# Altium PCB singlePCB.PcbDoc
Units mm, origin at the board's own origin, x right, y up, seen from the top; angles counter-clockwise.
Board outline 20 x 23.65 mm, 2 copper layers (Top Layer, Bottom Layer); 2 components, 1 nets, 2 pads, 2 vias.
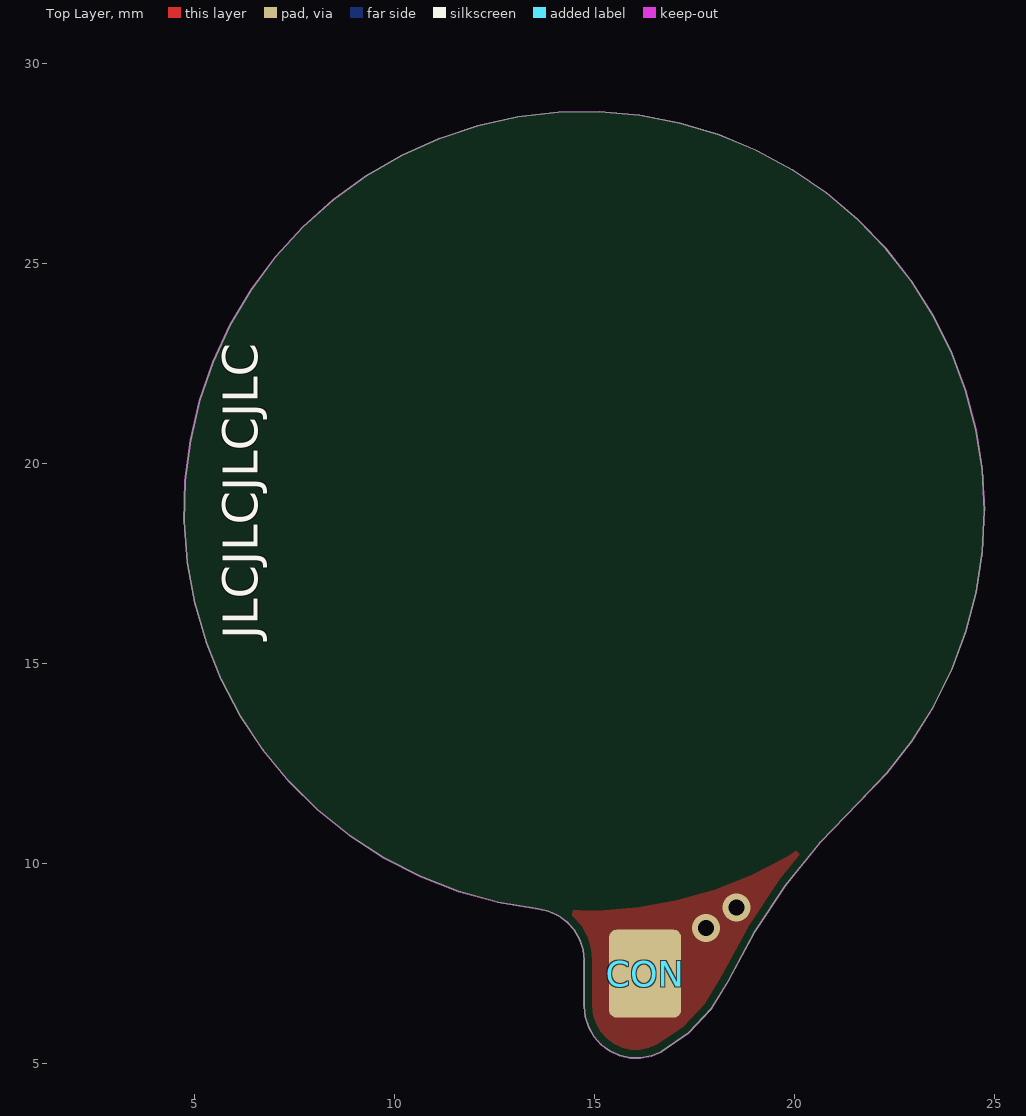
[diagram p0: Top Layer view]
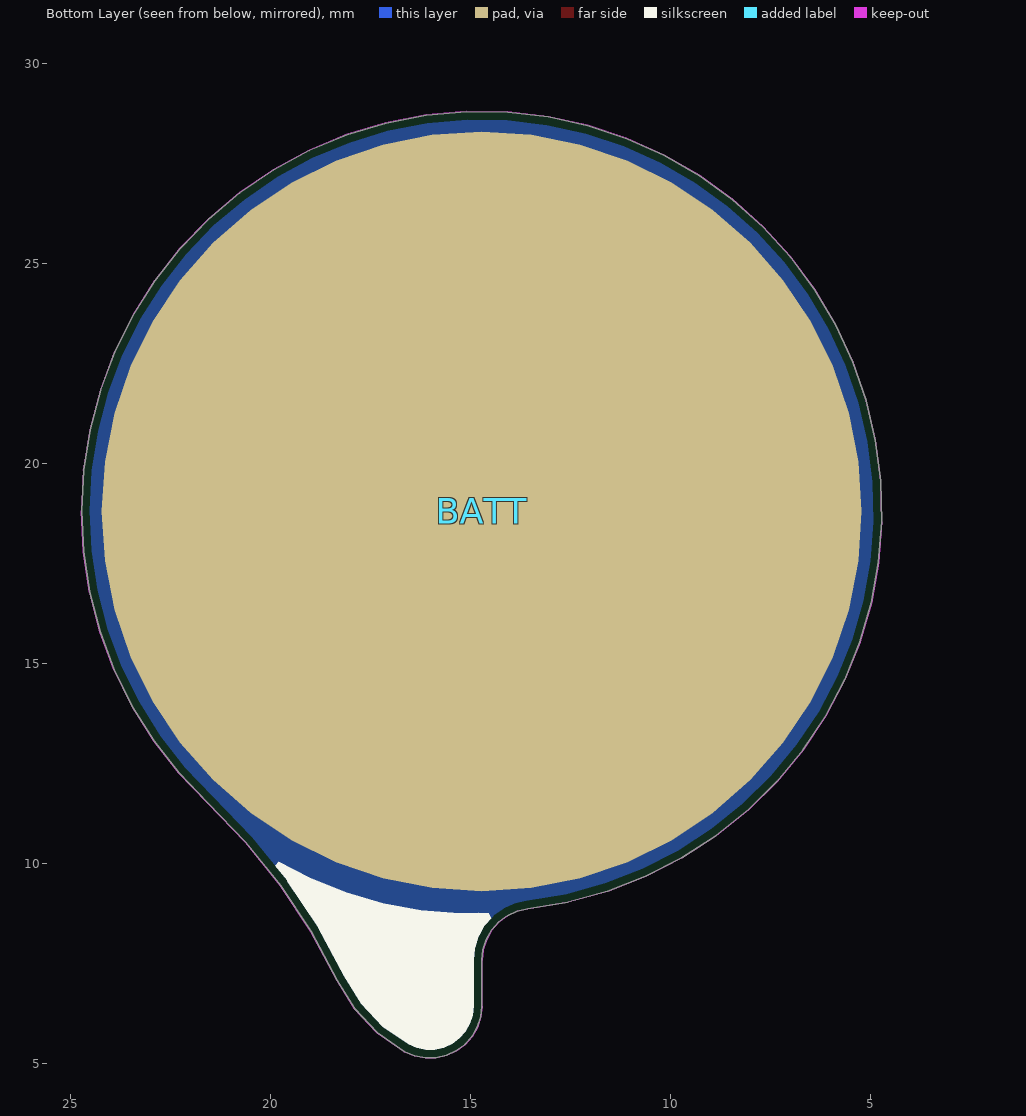
[diagram p1: Bottom Layer view, seen from below]

## Layer stack, top to bottom
Top Solder: solder mask 0.0102, Solder Resist, Dk 3.5
Top Layer: signal copper 0.0356
Dielectric 1: dielectric 0.32, FR-4, Dk 4.8
Bottom Layer: signal copper 0.0356
Bottom Solder: solder mask 0.0102, Solder Resist, Dk 3.5

## Board outline
14.732,6.43 14.76,6.162 14.842,5.906 14.975,5.672 15.154,5.471 15.37,5.311 15.615,5.198 15.877,5.139 16.146,5.135 16.41,5.186 16.658,5.29 17.339,5.762 17.907,6.364 18.34,7.07 18.994,8.289 19.758,9.443 20.625,10.522 21.588,11.516 22.294,12.253 22.922,13.058 23.464,13.923 23.915,14.838 24.271,15.795 24.527,16.783 24.681,17.792 24.732,18.812 24.678,19.831 24.521,20.84 24.262,21.827 23.903,22.783 23.449,23.697 22.904,24.56 22.273,25.363 21.565,26.098 20.785,26.756 19.942,27.332 19.044,27.818 18.102,28.211 17.125,28.506 16.122,28.699 15.106,28.789 14.085,28.775 13.071,28.657 12.074,28.436 11.105,28.115 10.174,27.697 9.291,27.186 8.464,26.588 7.702,25.908 7.014,25.154 6.406,24.334 5.884,23.457 5.455,22.53 5.123,21.565 4.891,20.571 4.761,19.559 4.735,18.538 4.814,17.52 4.995,16.516 5.279,15.535 5.66,14.589 6.136,13.686 6.702,12.836 7.352,12.048 8.078,11.331 8.874,10.692 9.73,10.137 10.639,9.672 11.591,9.302 12.575,9.031 13.582,8.862 13.845,8.804 14.09,8.692 14.308,8.532 14.487,8.33 14.621,8.096 14.704,7.839 14.732,7.571

## Design rules (kind name [scope] priority, off if disabled: settings)
BoardOutlineClearance BoardOutlineClearance_1 [All] p1: gap=0.2 ignorepadtopadclearanceinfootprint=FALSE
BoardOutlineClearance BoardOutlineClearance_silk [OnLayer('Top Overlay')] p2: gap=0 ignorepadtopadclearanceinfootprint=FALSE
BoardOutlineClearance BoardOutlineClearance_solder [OnLayer('Top Solder')] p3: gap=0 ignorepadtopadclearanceinfootprint=FALSE
Clearance Clearance_1 [OnLayer('Top Solder') vs OnLayer('Keep-Out Layer')] p1: gap=0 ignorepadtopadclearanceinfootprint=FALSE
Clearance Polygon_ANT [(InNamedPolygon('Top_Layer-GND')) or (InNamedPolygon('Bottom_Layer-GND')) vs InNet('RF')] p2: gap=0.127 ignorepadtopadclearanceinfootprint=FALSE
Clearance Polygon [(InNamedPolygon('Top_Layer-GND')) or (InNamedPolygon('Bottom_Layer-GND')) or (InNamedPolygon('Mid_Layer_1-GND')) or (InNamedPolygon('Mid_Layer_2-GND'))] p3: gap=0.127 ignorepadtopadclearanceinfootprint=FALSE
Clearance [All] p4: gap=0.127 ignorepadtopadclearanceinfootprint=FALSE
ComponentClearance [All] p1 off: gap=0.254 collisioncheckmode=3 verticalgap=0.254 showdistances=FALSE
FabricationTestPointUsage TestPointUsage [All] p1: valid=0 allowmultiple=FALSE
FabricationTestpoint Testpoint [All] p1: side=3 testpointundercomponent=TRUE minsize=1.016 maxsize=2.54 preferedsize=1.524 minholesize=0 maxholesize=1.016 preferedholesize=0.813 testpointgrid=0.025 allowsidetop=TRUE allowsidebottom=TRUE usegrid=TRUE gridtolerance=0
Height [All] p1 off: minheight=0 maxheight=25.4 prefheight=12.7
HoleSize [All] p1: absolutevalues=TRUE maxlimit=4.064 minlimit=0.076 maxpercent=80.000 minpercent=20.000
HoleToHoleClearance [All] p1 off: gap=0.076 allowstackedmicrovias=FALSE
MinimumAnnularRing [All] p1 off: minimumring=0.1
PlaneClearance [InNet('VCC')] p1: clearance=0
PlaneClearance PlaneClearance_1 [All] p2: clearance=0
PlaneConnect PlaneConnect_1 [All] p1: planeconnectstyle=Relief reliefexpansion=0.508 reliefentries=4 reliefconductorwidth=0.254 reliefairgap=0.254
PolygonConnect smallPoly [All] p1: connectstyle=Direct reliefconductorwidth=0.254 reliefentries=4 polygonreliefangle="90 Angle" airgapwidth=0.254
RoutingVias [All] p1: holewidth=0.406 width=0.813 viastyle="Through Hole" minholewidth=0.1 minwidth=0.25 maxholewidth=0.711 maxwidth=1.27
SilkToSolderMaskClearance SilkscreenOverComponentPads [IsPad] p1: minsilkscreentomaskgap=0.254 clearancetoexposedcopper=TRUE
SolderMaskExpansion [All] p1: expansion=0.076
Width [All] p1: maxlimit=2.54 minlimit=0.127 preferedwidth=0.25 minimp=50.000000 maximp=50.000000 favimp=50.000000
21 further rules are at their usual default settings.

## Components (designator, comment, footprint, x,y, rotation, side; value= is the part's Value field where it differs from the comment)
BATT "batteryTerminal" PCBComponent_1 14.732,18.796 r0 top
CON "cableContact" CABLECONTQACT 16.256,7.239 r0 top

## Footprints (in the part's own frame and the unit in brackets; to place one, negate y for a bottom-side part, rotate by r counter-clockwise, add the part's x,y. Pads: shape width x height; smd on the part's side, far side on the other; paste and mask are expansions set on the pad)
CABLECONTQACT [mm]
  rrect20% 1.8x2.2 smd mask+0: 1(0,0)
PCBComponent_1 [mm]
  round 19 smd far side mask+0.5: 1(0,0)

## Via types
v1: diameter 0.7, hole 0.4, Top Layer to Bottom Layer, tented both sides, 2 vias

## Nets (pads, with @x,y where several pads share a name; then routed paths per layer and width w, separated by ;. In a path a pad name is that pad's centre, name@x,y a point inside that pad or via, vN(x,y) a via of type N, cw(c..) or ccw(c..) an arc to the next point about the centre after c; other vN are vias at no path point)
NetBATT_1: BATT.1 CON.1
  other v1: 17.78,8.382 18.542,8.89

## Polygon pours and split planes (outlines as drawn)
NetBATT_1 on Top Layer "Top Layer-NetBATT_1" (solid, pour order 0): 12.306,9.111 12.306,8.431 ccw(c14.846,8.431) 13.05,6.635 14.986,4.699 ccw(c15.599,5.312) 15.599,4.445 16.347,4.445 ccw(c16.347,6.985) 18.143,5.189 22.551,9.597 ccw(c20.755,11.393) 23.295,11.393 23.295,13.663
no net on Top Layer "Top Layer-No Net 1" (solid, pour order 2): 24.384,10.922
no net on Top Solder "Top Layer-No Net" (solid, pour order 4): 14.655,8.879 cw(c14.094,19.455) 3.522,18.812 cw(c14.078,18.158) 14.732,28.713 cw(c14.919,18.761) 24.87,19.025 cw(c14.689,19.059)
NetBATT_1 on Bottom Layer (solid, pour order 23): 1.34,27.44 1.34,2.02 26.74,2.02 26.74,33.52 1.12,33.52
no net on Bottom Layer (solid, pour order 19): 11,10.06
no net on Bottom Layer (solid, pour order 17): 12.54,9.54
no net on Bottom Layer (solid, pour order 15): 13.9,9.35
no net on Bottom Layer (solid, pour order 13): 13.64,10.28
no net on Bottom Layer (solid, pour order 11): 12,9.7
no net on Bottom Layer (solid, pour order 9): 12.9,9.5
no net on Bottom Layer (solid, pour order 7): 13.9,9.35
no net on Bottom Overlay (solid): 12.66,9.92 12.66,4.24 22.72,4.24 22.72,11.62

## Keep-outs
Keep-Out Layer:
  lines w0.02: 10.169,27.706 9.286,27.195 ; 13.579,8.853 13.58,8.853 ; 13.58,8.853 13.58,8.853 ; 24.688,19.831 ccw(c24.678,19.831) 24.688,19.832 ; 24.692,17.792 cw(c24.681,17.792) 24.692,17.792 ; 4.725,18.537 cw(c4.735,18.538) 4.725,18.538 ; 4.725,18.537 cw(c4.735,18.538) 4.725,18.538 ; 4.725,18.537 4.725,18.538 ; 4.725,18.537 4.725,18.537 ; 4.725,18.537 4.804,17.52 ; 4.725,18.538 ccw(c4.735,18.538) 4.725,18.538 ; 4.725,18.538 4.751,19.559 ; 4.751,19.56 ccw(c4.761,19.559) 4.751,19.559 ; 4.751,19.56 cw(c4.761,19.559) 4.751,19.56 ; 4.751,19.559 cw(c4.761,19.559) 4.751,19.56 ; 4.751,19.56 4.751,19.56 ; 4.751,19.56 4.881,20.572 ; 4.751,19.56 4.751,19.56 ; 4.804,17.52 ccw(c4.814,17.52) 4.804,17.519 ; 4.804,17.52 ccw(c4.814,17.52) 4.804,17.52 ; 4.804,17.52 ccw(c4.814,17.52) 4.804,17.519 ; 4.804,17.52 4.804,17.52 ; 4.804,17.52 4.804,17.52 ; 4.804,17.519 4.986,16.514 ; 4.881,20.573 ccw(c4.891,20.571) 4.881,20.572 ; 4.881,20.573 cw(c4.891,20.571) 4.881,20.574 ; 4.881,20.573 ccw(c4.891,20.571) 4.881,20.572 ; 4.881,20.573 cw(c4.891,20.571) 4.881,20.573 ; 4.881,20.573 4.881,20.573 ; 4.881,20.572 4.881,20.573 ; 4.881,20.572 4.881,20.572 ; 4.881,20.574 5.113,21.567 ; 4.881,20.573 4.881,20.574 ; 4.986,16.513 cw(c4.995,16.516) 4.986,16.513 ; 4.986,16.513 4.986,16.513 ; 4.986,16.513 5.269,15.533 ; 4.986,16.514 ccw(c4.995,16.516) 4.986,16.513 ; 4.986,16.514 ccw(c4.995,16.516) 4.986,16.513 ; 4.986,16.513 4.986,16.513 ; 5.113,21.567 cw(c5.123,21.565) 5.114,21.568 ; 5.113,21.568 ccw(c5.123,21.565) 5.113,21.567 ; 5.113,21.568 cw(c5.123,21.565) 5.114,21.568 ; 5.113,21.567 5.113,21.568 ; 5.113,21.567 5.113,21.567 ; 5.114,21.568 5.446,22.534 ; 5.269,15.532 ccw(c5.279,15.535) 5.269,15.531 ; 5.269,15.532 ccw(c5.279,15.535) 5.269,15.531 ; 5.269,15.533 ccw(c5.279,15.535) 5.269,15.532 ; 5.269,15.531 5.651,14.585 ; 5.269,15.533 5.269,15.532 ; 5.269,15.532 5.269,15.532 ; 5.446,22.534 cw(c5.455,22.53) 5.446,22.534 ; 5.446,22.534 cw(c5.455,22.53) 5.446,22.535 ; 5.446,22.535 ccw(c5.455,22.53) 5.446,22.534 ; 5.446,22.535 5.875,23.461 ; 5.446,22.535 5.446,22.535 ; 5.446,22.534 5.446,22.535 ; 5.651,14.584 cw(c5.66,14.589) 5.651,14.585 ; 5.651,14.584 ccw(c5.66,14.589) 5.651,14.584 ; 5.651,14.584 cw(c5.66,14.589) 5.651,14.585 ; 5.651,14.584 5.651,14.584 ; 5.651,14.584 5.651,14.584 ; 5.651,14.584 6.127,13.681 ; 5.875,23.461 cw(c5.884,23.457) 5.876,23.462 ; 5.875,23.461 ccw(c5.884,23.457) 5.875,23.461 ; 5.875,23.461 cw(c5.884,23.457) 5.876,23.462 ; 5.875,23.461 5.875,23.461 ; 5.875,23.461 5.875,23.461 ; 5.876,23.462 6.397,24.339 ; 6.128,13.681 ccw(c6.136,13.686) 6.128,13.68 ; 6.127,13.681 ccw(c6.136,13.686) 6.128,13.681 ; 6.128,13.68 ccw(c6.136,13.686) 6.128,13.68 ; 6.128,13.681 ccw(c6.136,13.686) 6.128,13.68 ; 6.127,13.681 6.128,13.681 ; 6.128,13.681 6.128,13.681 ; 6.128,13.68 6.128,13.68 ; 6.128,13.68 6.128,13.68 ; 6.128,13.68 6.694,12.83 ; 6.397,24.339 cw(c6.406,24.334) 6.398,24.34 ; 6.397,24.339 cw(c6.406,24.334) 6.398,24.34 ; 6.398,24.34 7.006,25.16 ; 6.694,12.83 cw(c6.702,12.836) 6.694,12.83 ; 6.694,12.83 ccw(c6.702,12.836) 6.695,12.829 ; 6.694,12.83 cw(c6.702,12.836) 6.694,12.83 ; 6.694,12.83 6.694,12.83 ; 6.694,12.83 6.695,12.829 ; 6.695,12.829 7.344,12.042 ; 6.694,12.83 ccw(c6.702,12.836) 6.694,12.83 ; 6.694,12.83 6.694,12.83 ; 6.694,12.83 6.694,12.83 ; 7.006,25.16 cw(c7.014,25.154) 7.006,25.161 ; 7.006,25.16 cw(c7.014,25.154) 7.006,25.161 ; 7.006,25.161 ccw(c7.014,25.154) 7.006,25.161 ; 7.006,25.161 7.695,25.915 ; 7.006,25.161 7.006,25.161 ; 7.006,25.161 7.006,25.161 ; 7.344,12.041 ccw(c7.352,12.048) 7.345,12.041 ; 7.344,12.041 cw(c7.352,12.048) 7.344,12.042 ; 7.345,12.041 cw(c7.352,12.048) 7.344,12.042 ; 7.345,12.041 8.071,11.324 ; 7.345,12.041 7.345,12.041 ; 7.344,12.041 7.345,12.041 ; 7.344,12.042 ccw(c7.352,12.048) 7.344,12.042 ; 7.344,12.042 7.344,12.042 ; 7.344,12.042 7.344,12.042 ; 7.695,25.915 cw(c7.702,25.908) 7.695,25.915 ; 7.695,25.915 ccw(c7.702,25.908) 7.695,25.915 ; 7.695,25.915 cw(c7.702,25.908) 7.695,25.915 ; 7.695,25.915 7.695,25.915 ; 7.695,25.915 7.695,25.915 ; 7.695,25.915 8.457,26.595 ; 8.071,11.324 ccw(c8.078,11.331) 8.072,11.323 ; 8.071,11.324 cw(c8.078,11.331) 8.071,11.324 ; 8.071,11.324 8.071,11.324 ; 8.071,11.324 ccw(c8.078,11.331) 8.072,11.323 ; 8.071,11.324 8.071,11.324 ; 8.072,11.323 8.867,10.684 ; 8.457,26.595 cw(c8.464,26.588) 8.458,26.596 ; 8.457,26.595 cw(c8.464,26.588) 8.458,26.596 ; 8.458,26.596 9.285,27.194 ; 8.867,10.684 ccw(c8.874,10.692) 8.868,10.683 ; 8.867,10.684 ccw(c8.874,10.692) 8.868,10.683 ; 8.868,10.683 9.725,10.128 ; 9.285,27.194 cw(c9.291,27.186) 9.286,27.195 ; 9.285,27.194 cw(c9.291,27.186) 9.286,27.195 ; 9.725,10.128 ccw(c9.73,10.137) 9.726,10.128 ; 9.725,10.128 ccw(c9.73,10.137) 9.726,10.128 ; 9.726,10.128 ccw(c9.73,10.137) 9.726,10.128 ; 9.726,10.128 10.635,9.663 ; 9.726,10.128 9.726,10.128 ; 9.726,10.128 9.726,10.128 ; 10.17,27.706 ccw(c10.174,27.697) 10.169,27.706 cw(c10.174,27.697) 10.17,27.706 ; 10.17,27.706 ccw(c10.174,27.697) 10.17,27.706 ; 10.17,27.706 11.101,28.124 ; 10.17,27.706 10.17,27.706 ; 10.17,27.706 10.17,27.706 ; 10.636,9.663 cw(c10.639,9.672) 10.635,9.663 ; 10.636,9.663 cw(c10.639,9.672) 10.635,9.663 ; 10.636,9.663 11.587,9.293 ; 10.635,9.663 ccw(c10.639,9.672) 10.635,9.663 ; 10.635,9.663 10.635,9.663 ; 10.635,9.663 10.635,9.663 ; 11.101,28.124 cw(c11.105,28.115) 11.102,28.125 ; 11.102,28.124 ccw(c11.105,28.115) 11.101,28.124 ; 11.102,28.124 cw(c11.105,28.115) 11.102,28.125 ; 11.101,28.124 11.102,28.124 ; 11.101,28.124 11.101,28.124 ; 11.102,28.125 12.071,28.446 ; 11.587,9.293 ccw(c11.591,9.302) 11.588,9.293 ; 11.587,9.293 ccw(c11.591,9.302) 11.588,9.293 ; 11.588,9.293 12.572,9.022 ; 12.071,28.446 cw(c12.074,28.436) 12.072,28.446 ; 12.071,28.446 cw(c12.074,28.436) 12.072,28.446 ; 12.072,28.446 13.069,28.667 ; 12.572,9.022 ccw(c12.575,9.031) 12.573,9.022 ; 12.572,9.022 ccw(c12.575,9.031) 12.573,9.022 ; 12.573,9.022 13.58,8.853 ; 13.069,28.667 cw(c13.071,28.657) 13.07,28.667 ; 13.069,28.667 cw(c13.071,28.657) 13.07,28.667 ; 13.07,28.667 14.084,28.785 ; 13.58,8.853 13.842,8.794 14.085,8.683 14.301,8.524 14.479,8.324 14.612,8.092 14.694,7.837 14.722,7.571 14.722,6.43 ; 14.085,28.785 ccw(c14.085,28.775) 14.084,28.785 ; 14.085,28.785 ccw(c14.085,28.775) 14.084,28.785 ; 14.085,28.785 15.106,28.799 ; 14.722,6.429 cw(c14.732,6.43) 14.722,6.43 ; 14.722,6.429 cw(c14.732,6.43) 14.722,6.43 ; 14.722,6.429 14.75,6.161 ; 14.75,6.159 cw(c14.76,6.162) 14.75,6.161 ; 14.75,6.159 cw(c14.76,6.162) 14.75,6.161 ; 14.75,6.159 14.833,5.903 ; 14.833,5.903 ccw(c14.842,5.906) 14.833,5.901 ; 14.833,5.903 ccw(c14.842,5.906) 14.833,5.901 ; 14.833,5.901 14.967,5.667 ; 14.967,5.667 ccw(c14.975,5.672) 14.968,5.666 ; 14.967,5.667 ccw(c14.975,5.672) 14.968,5.666 ; 14.968,5.666 15.146,5.464 ; 15.106,28.799 cw(c15.106,28.789) 15.107,28.799 ; 15.106,28.799 cw(c15.106,28.789) 15.107,28.799 ; 15.107,28.799 16.123,28.709 ; 15.146,5.464 ccw(c15.154,5.471) 15.148,5.463 ; 15.146,5.464 ccw(c15.154,5.471) 15.148,5.463 ; 15.148,5.463 ccw(c15.154,5.471) 15.148,5.463 ; 15.148,5.463 15.148,5.463 ; 15.148,5.463 15.364,5.303 ; 15.148,5.463 15.148,5.463 ; 15.364,5.303 ccw(c15.37,5.311) 15.366,5.302 ; 15.364,5.303 ccw(c15.37,5.311) 15.364,5.303 ; 15.364,5.303 ccw(c15.37,5.311) 15.366,5.302 ; 15.364,5.303 15.364,5.303 ; 15.364,5.303 15.364,5.303 ; 15.366,5.302 15.61,5.189 ; 15.61,5.189 ccw(c15.615,5.198) 15.612,5.189 ; 15.61,5.189 ccw(c15.615,5.198) 15.612,5.189 ; 15.612,5.189 ccw(c15.615,5.198) 15.612,5.189 ; 15.612,5.189 15.875,5.129 ; 15.612,5.189 15.612,5.189 ; 15.612,5.189 15.612,5.189 ; 15.875,5.129 ccw(c15.877,5.139) 15.877,5.129 ; 15.875,5.129 ccw(c15.877,5.139) 15.877,5.129 ; 15.875,5.129 ccw(c15.877,5.139) 15.875,5.129 ; 15.875,5.129 15.875,5.129 ; 15.875,5.129 15.875,5.129 ; 15.877,5.129 ccw(c15.877,5.139) 15.877,5.129 ; 15.877,5.129 16.146,5.125 ; 15.877,5.129 15.877,5.129 ; 15.877,5.129 15.877,5.129 ; 16.124,28.709 ccw(c16.122,28.699) 16.123,28.709 ; 16.124,28.709 ccw(c16.122,28.699) 16.123,28.709 ; 16.124,28.709 17.127,28.515 ; 16.146,5.125 ccw(c16.146,5.135) 16.148,5.125 ; 16.146,5.125 ccw(c16.146,5.135) 16.146,5.125 ; 16.146,5.125 ccw(c16.146,5.135) 16.148,5.125 ; 16.146,5.125 16.146,5.125 ; 16.146,5.125 16.146,5.125 ; 16.148,5.125 16.412,5.176 ; 16.412,5.176 ccw(c16.41,5.186) 16.414,5.177 ; 16.412,5.176 ccw(c16.41,5.186) 16.414,5.176 ; 16.414,5.176 ccw(c16.41,5.186) 16.414,5.177 ; 16.414,5.177 16.662,5.281 ; 16.414,5.177 16.414,5.177 ; 16.414,5.176 16.414,5.177 ; 16.662,5.281 ccw(c16.658,5.29) 16.662,5.281 ; 16.662,5.281 16.662,5.281 ; 16.662,5.281 ccw(c16.658,5.29) 16.664,5.282 ; 16.662,5.281 ccw(c16.658,5.29) 16.664,5.282 ; 16.662,5.281 16.662,5.281 ; 16.664,5.282 ccw(c16.658,5.29) 16.664,5.282 ; 16.664,5.282 17.344,5.754 ; 16.664,5.282 16.664,5.282 ; 16.664,5.282 16.664,5.282 ; 17.128,28.515 ccw(c17.125,28.506) 17.127,28.515 ; 17.128,28.515 ccw(c17.125,28.506) 17.128,28.515 ; 17.128,28.515 ccw(c17.125,28.506) 17.127,28.515 ; 17.128,28.515 18.105,28.221 ; 17.128,28.515 17.128,28.515 ; 17.128,28.515 17.128,28.515 ; 17.344,5.754 ccw(c17.339,5.762) 17.346,5.755 ; 17.344,5.754 ccw(c17.339,5.762) 17.344,5.754 ; 17.344,5.754 ccw(c17.339,5.762) 17.346,5.755 ; 17.344,5.754 17.344,5.754 ; 17.344,5.754 17.344,5.754 ; 17.346,5.755 17.915,6.357 ; 17.915,6.357 ccw(c17.907,6.364) 17.916,6.358 ; 17.915,6.357 ccw(c17.907,6.364) 17.916,6.358 ; 17.916,6.358 18.349,7.064 ; 18.105,28.221 cw(c18.102,28.211) 18.106,28.22 ; 18.105,28.221 ccw(c18.102,28.211) 18.105,28.221 ; 18.105,28.221 cw(c18.102,28.211) 18.106,28.22 ; 18.105,28.221 18.105,28.221 ; 18.105,28.221 18.105,28.221 ; 18.106,28.22 ccw(c18.102,28.211) 18.106,28.22 ; 18.106,28.22 19.048,27.828 ; 18.106,28.22 18.106,28.22 ; 18.106,28.22 18.106,28.22 ; 18.349,7.065 ccw(c18.34,7.07) 18.349,7.065 ; 18.349,7.064 ccw(c18.34,7.07) 18.349,7.065 ; 18.349,7.064 ccw(c18.34,7.07) 18.349,7.065 ; 18.349,7.065 19.003,8.284 19.766,9.437 20.633,10.515 21.595,11.509 ; 18.349,7.065 18.349,7.065 ; 18.349,7.065 18.349,7.065 ; 19.049,27.827 ccw(c19.044,27.818) 19.048,27.828 ; 19.048,27.828 ccw(c19.044,27.818) 19.048,27.828 ; 19.049,27.827 ccw(c19.044,27.818) 19.048,27.828 ; 19.048,27.828 19.048,27.828 ; 19.049,27.827 19.947,27.341 ; 19.048,27.828 19.048,27.828 ; 19.947,27.341 cw(c19.942,27.332) 19.947,27.34 ; 19.947,27.341 cw(c19.942,27.332) 19.947,27.34 ; 19.947,27.34 20.79,26.764 ; 20.79,26.764 cw(c20.785,26.756) 20.791,26.764 ; 20.79,26.764 cw(c20.785,26.756) 20.791,26.764 ; 20.791,26.764 ccw(c20.785,26.756) 20.791,26.764 ; 20.791,26.764 21.571,26.105 ; 20.791,26.764 20.791,26.764 ; 20.791,26.764 20.791,26.764 ; 21.571,26.105 cw(c21.565,26.098) 21.572,26.105 ; 21.571,26.105 ccw(c21.565,26.098) 21.571,26.105 ; 21.571,26.105 cw(c21.565,26.098) 21.572,26.105 ; 21.571,26.105 21.571,26.105 ; 21.571,26.105 21.571,26.105 ; 21.572,26.105 ccw(c21.565,26.098) 21.572,26.105 ; 21.572,26.105 21.572,26.105 ; 21.572,26.105 21.572,26.105 ; 21.572,26.105 22.281,25.37 ; 21.595,11.509 ccw(c21.588,11.516) 21.595,11.509 ; 21.595,11.509 ccw(c21.588,11.516) 21.595,11.509 ; 21.595,11.509 22.301,12.246 ; 22.281,25.369 ccw(c22.273,25.363) 22.281,25.37 ; 22.281,25.37 ccw(c22.273,25.363) 22.281,25.37 ; 22.281,25.369 ccw(c22.273,25.363) 22.281,25.37 ; 22.281,25.369 22.912,24.566 ; 22.281,25.37 22.281,25.37 ; 22.281,25.37 22.281,25.37 ; 22.301,12.246 ccw(c22.294,12.253) 22.302,12.247 ; 22.301,12.246 ccw(c22.294,12.253) 22.302,12.247 ; 22.302,12.247 22.93,13.052 ; 22.912,24.565 ccw(c22.904,24.56) 22.912,24.566 ; 22.912,24.565 ccw(c22.904,24.56) 22.912,24.565 ; 22.912,24.565 ccw(c22.904,24.56) 22.912,24.566 ; 22.912,24.565 22.912,24.565 ; 22.912,24.565 22.912,24.565 ; 22.912,24.565 23.457,23.702 ; 22.93,13.052 ccw(c22.922,13.058) 22.93,13.053 ; 22.93,13.052 ccw(c22.922,13.058) 22.93,13.053 ; 22.93,13.053 23.473,13.917 ; 23.457,23.702 cw(c23.449,23.697) 23.458,23.701 ; 23.457,23.702 ccw(c23.449,23.697) 23.457,23.702 ; 23.457,23.702 cw(c23.449,23.697) 23.458,23.701 ; 23.457,23.702 23.457,23.702 ; 23.457,23.702 23.457,23.702 ; 23.458,23.701 23.912,22.787 ; 23.473,13.917 ccw(c23.464,13.923) 23.473,13.918 ; 23.473,13.917 ccw(c23.464,13.923) 23.473,13.918 ; 23.473,13.918 ccw(c23.464,13.923) 23.473,13.918 ; 23.473,13.918 23.924,14.834 ; 23.473,13.918 23.473,13.918 ; 23.473,13.918 23.473,13.918 ; 23.912,22.787 cw(c23.903,22.783) 23.912,22.786 ; 23.912,22.787 cw(c23.903,22.783) 23.912,22.786 ; 23.912,22.786 ccw(c23.903,22.783) 23.912,22.786 ; 23.912,22.786 23.912,22.786 ; 23.912,22.786 23.912,22.786 ; 23.912,22.786 24.271,21.831 24.271,21.831 ; 23.925,14.834 ccw(c23.915,14.838) 23.925,14.835 ; 23.924,14.834 ccw(c23.915,14.838) 23.925,14.834 ; 23.924,14.834 ccw(c23.915,14.838) 23.925,14.835 ; 23.924,14.834 23.925,14.834 ; 23.924,14.834 23.924,14.834 ; 23.925,14.835 24.28,15.792 ; 24.271,21.83 ccw(c24.262,21.827) 24.271,21.831 ; 24.271,21.829 ccw(c24.262,21.827) 24.271,21.83 ; 24.271,21.83 ccw(c24.262,21.827) 24.271,21.831 ; 24.271,21.83 ccw(c24.262,21.827) 24.271,21.83 ; 24.271,21.83 24.271,21.83 ; 24.271,21.83 24.271,21.829 ; 24.271,21.829 24.531,20.842 ; 24.271,21.831 24.271,21.83 ; 24.28,15.792 ccw(c24.271,15.795) 24.281,15.793 ; 24.28,15.792 ccw(c24.271,15.795) 24.281,15.793 ; 24.281,15.793 24.537,16.781 ; 24.531,20.842 cw(c24.521,20.84) 24.531,20.841 ; 24.531,20.842 ccw(c24.521,20.84) 24.531,20.842 ; 24.531,20.842 cw(c24.521,20.84) 24.531,20.841 ; 24.531,20.842 24.531,20.842 ; 24.531,20.842 24.531,20.842 ; 24.531,20.841 24.688,19.833 ; 24.537,16.781 ccw(c24.527,16.783) 24.537,16.782 ; 24.537,16.781 ccw(c24.527,16.783) 24.537,16.782 ; 24.537,16.782 24.691,17.791 ; 24.688,19.832 ccw(c24.678,19.831) 24.688,19.833 ; 24.688,19.832 ccw(c24.678,19.831) 24.688,19.833 ; 24.688,19.832 24.742,18.812 ; 24.691,17.791 ccw(c24.681,17.792) 24.691,17.792 ; 24.691,17.791 ccw(c24.681,17.792) 24.691,17.792 ; 24.691,17.792 ccw(c24.681,17.792) 24.692,17.792 ; 24.692,17.792 24.742,18.811 ; 24.691,17.792 24.692,17.792 ; 24.691,17.792 24.691,17.792 ; 24.742,18.812 ccw(c24.732,18.812) 24.742,18.812 ; 24.742,18.812 ccw(c24.732,18.812) 24.742,18.812 ; 24.742,18.811 ccw(c24.732,18.812) 24.742,18.812 ; 24.742,18.811 ccw(c24.732,18.812) 24.742,18.811 ; 24.742,18.811 ccw(c24.732,18.812) 24.742,18.812 ; 24.742,18.811 24.742,18.811 ; 24.742,18.811 24.742,18.811

## Other copper
Top Layer:
  pour cut-out: 23.368,12.954
  pour cut-out: 14.608,8.826 cw(c14.539,18.796) 14.539,28.766 cw(c14.732,18.796) 24.703,18.719 cw(c14.809,18.719)
  pour cut-out: 2.159,30.099

## Silkscreen, mask and mechanical layers (free items; w line width, h text height)
Top Overlay:
  text "JLCJLCJLCJLC" at 6.86,15.6 h1.5 r90
Bottom Overlay:
  pour cut-out: 14.8,8.76 cw(c14.527,18.761) 14.528,28.766 cw(c14.732,18.796) 24.7,18.518 cw(c14.974,18.484)